# Altium PCB Ultimate_Strat_PCB.PcbDoc (part 2 of 2)
Units mil, origin at the board's own origin, x right, y up, seen from the top; angles counter-clockwise.
Board outline 3685.72 x 1696.1 mil, 2 copper layers (Top Layer, Bottom Layer); 37 components, 56 nets, 274 pads, 347 vias.
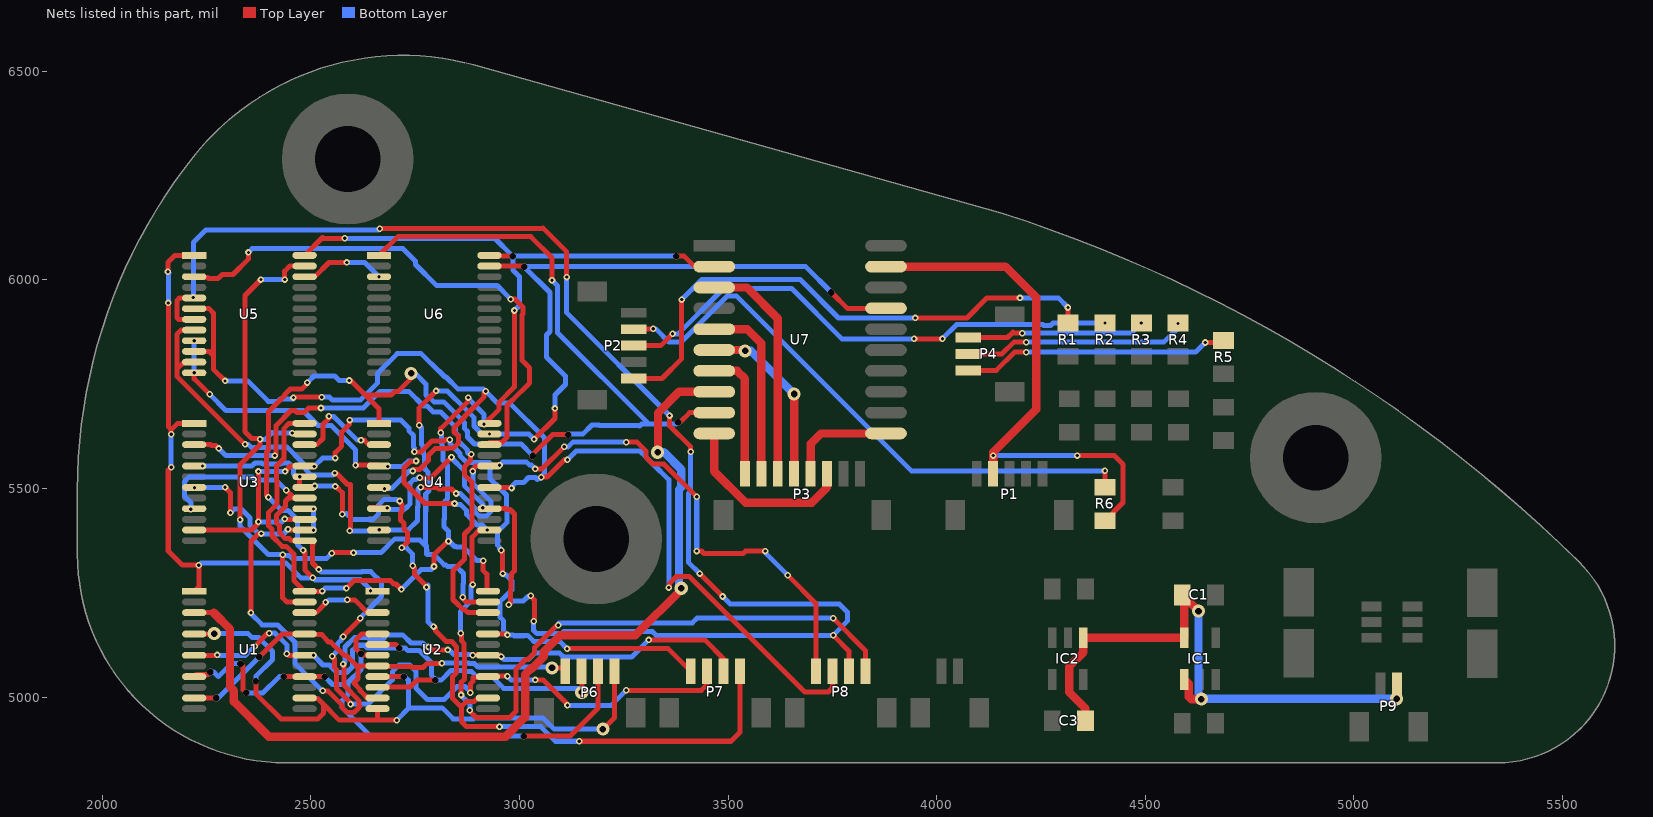
[diagram p2: the nets of this part, all layers, seen from the top]

## Via types
v1: diameter 15.75, hole 7.87, Top Layer to Bottom Layer, 274 vias
v2: diameter 31.5, hole 15.75, Top Layer to Bottom Layer, 47 vias
v3: diameter 15.75, hole 15.75, Top Layer to Bottom Layer, 24 vias
v4: diameter 31.5, hole 7.87, Top Layer to Bottom Layer, 2 vias

## Nets (pads, with @x,y where several pads share a name; then routed paths per layer and width w, separated by ;. In a path a pad name is that pad's centre, name@x,y a point inside that pad or via, vN(x,y) a via of type N, cw(c..) or ccw(c..) an arc to the next point about the centre after c; other vN are vias at no path point) (continued)
NetP1_4: P1.4 R6.2 U7.19 | length 1332.8
  Top Layer w12: v1@4133,5576 4135.63,5578.63 v1(4136,5579) ; v1(4337,5579) 4426,5579 4447,5558 4447,5466.33 R6.2@4403.67,5423
  Top Layer w20: U7.19@3878.81,6032 4165,6032 4239.17,5957.83 4239.17,5690.17 4135.63,5586.63 4135.63,5578.63 P1.4@4135.63,5535.88
  Bottom Layer w12: v1(4136,5579) v1(4337,5579)
NetP2_1: P2.1 R1.1 | length 1327
  Top Layer w12: P2.1@3273.92,5763.89 3341.89,5763.89 3389,5811 v1(3389,5953) ; v1(3949,5909) 4073,5909 4121,5957 v1(4200,5957) ; R1.1@4315,5897 v1(4315,5934)
  Bottom Layer w12: v1(3389,5953) 3437,6001 3673,6001 3765,5909 v1(3949,5909) ; v1(4200,5957) 4292,5957 v1(4315,5934)
NetP2_3: P2.3 R2.1 | length 1253.5
  Top Layer w12: P2.3@3273.92,5842.63 3338.63,5842.63 v1(3367,5871) ; v1(3946,5859) v1(4014,5859)
  Bottom Layer w12: v1(3367,5871) 3381,5871 3489.35,5979.35 3652.65,5979.35 3773,5859 v1(3946,5859) ; v1(4014,5859) 4047.7,5892.7 4254.77,5892.7 4256.64,5890.83 4273.36,5890.83 4279.53,5897 v1(4403.67,5897)
NetP2_4: P2.4 R6.1 | length 1401.9
  Top Layer w12: P2.4@3273.92,5882 3320,5882 v1(3321,5883) ; R6.1@4403.67,5503 v1(4403.67,5542.33)
  Bottom Layer w12: v1(3321,5883) 3326.47,5883 3358.64,5850.83 3387.16,5850.83 3497.38,5961.05 3520.62,5961.05 3939.33,5542.33 v1(4403.67,5542.33)
NetP3_3: P3.3 U7.10 | length 440.8
  Top Layer w20: U7.10@3467,5632 3467,5541 3541.83,5466.17 3701.17,5466.17 3737.32,5502.32 P3.3@3737.32,5535.88
NetP3_4: P3.4 U7.11 | length 262.3
  Top Layer w20: P3.4@3697.95,5535.88 3697.95,5606.95 3723,5632 U7.11@3878.81,5632
NetP3_5: P3.5 U7.6 | length 425.9
  Top Layer w20: U7.6@3467,5832 3539,5832 v2(3541,5830) ; P3.5@3658.58,5535.88 v2(3658.58,5726.58)
  Bottom Layer w20: v2(3541,5830) 3555.15,5830 v2(3658.58,5726.58)
NetP3_6: P3.6 U7.3 | length 554.9
  Top Layer w20: U7.3@3467,5982 3545,5982 3619.21,5907.79 P3.6@3619.21,5535.88
NetP3_7: P3.7 U7.5 | length 439.1
  Top Layer w20: U7.5@3467,5882 3546,5882 3579.84,5848.16 P3.7@3579.84,5535.88
NetP3_8: P3.8 U7.7 | length 308.8
  Top Layer w20: U7.7@3467,5782 3522,5782 3540.47,5763.53 P3.8@3540.47,5535.88
NetP4_1: P4.1 R3.1 | length 432
  Top Layer w12: P4.1@4075.59,5861.92 4170.16,5861.92 4183.24,5875 4185.71,5872.53 v1(4205.35,5872.53)
  Bottom Layer w12: v1(4205.35,5872.53) 4466.53,5872.53 v1(4491,5897)
NetP4_2: P4.2 R4.1 | length 541.3
  Top Layer w12: P4.2@4075.59,5822.55 4156.67,5822.55 4185.12,5851 v1(4215,5851) ; v1(4579,5895.5) R4.1@4579,5897
  Bottom Layer w12: v1(4215,5851) 4545,5851 4579,5885 v1(4579,5895.5)
NetP4_3: P4.3 R5.1 | length 642.2
  Top Layer w12: P4.3@4075.59,5783.18 4143.18,5783.18 4187,5827 v1(4215,5827) ; v1(4644,5850) 4683,5850 R5.1@4688,5855
  Bottom Layer w12: v1(4215,5827) 4621,5827 v1(4644,5850)
NetU1_1: U1.1 U2.1 U3.1 U4.1 U5.1 U6.1 U7.9 | length 4230.1
  Top Layer w12: v1(2157,6020) 2157,6042 2174,6059 U5.1@2220,6059 ; v1(2158,5945) 2158,5648 2165,5641 ; v1(2165,5551) 2157.83,5543.83 2157.83,5350.17 2192,5316 v1(2231,5316) 2231,5264.59 U1.1@2220,5253.59 ; v1(2165,5630) 2165,5641 ; U3.1@2220,5656.3 2180.3,5656.3 2165,5641 ; v1(2398,5479) 2393.3,5483.7 2393.3,5531.77 2394.17,5532.64 2394.17,5549.36 2393.3,5550.23 2393.3,5587.36 2398.17,5592.23 2398.17,5683.7 2437.83,5723.36 2437.83,5726.36 2449.64,5738.17 2477.64,5738.17 2491,5751.53 v1(2491,5754) ; v1(2481,5352) 2485.23,5347.77 2485.23,5304.77 v1(2504,5286) ; v1(2592,5759) 2595.47,5759 2630.77,5723.7 ; U4.1@2663.14,5656.3 2663.14,5691.33 2630.77,5723.7 ; U6.1@2663.14,6059 2708.14,6104 3027,6104 3078,6053 v1(3078,5999) ; v2@2739.25,5775.25 2739.25,5763.37 2708.93,5733.05 2701.38,5733.05 2692.04,5723.7 2630.77,5723.7 ; v3(3032,5578) 3032,5582 3079,5629 v3(3117,5629) ; v3(3380,5659) 3385,5659 3408,5682 U7.9@3467,5682
  Top Layer w20: v2@2739.25,5775.25 v2(2740,5776)
  Bottom Layer w12: v1(2157,6020) 2160.22,6016.78 2158,6014.56 v1(2158,5945) ; v1(2165,5551) v1(2165,5630) ; v1(2231,5316) 2236.13,5321.13 2440.66,5321.13 2475.78,5286 v1(2504,5286) 2505.47,5286 2510.24,5281.23 2618.77,5281.23 2643,5257 v1(2643,5255) ; v1(2398,5479) 2429.83,5447.17 2445.36,5447.17 2467.53,5425 2467.53,5365.47 v1(2481,5352) ; v1(2491,5754) 2493.83,5756.83 2494.36,5756.83 2507.13,5769.6 2556.87,5769.6 2567.47,5759 v1(2592,5759) ; v2(2740,5776) 2750,5776 2775.83,5750.17 2775.83,5723.99 2783.7,5716.12 2786.18,5716.12 2794.61,5707.69 2818.31,5707.69 2868.53,5657.47 2868.53,5643.41 2875.47,5636.46 2875.47,5623.34 2891.99,5606.83 3003.88,5606.83 3032,5578.71 v3(3032,5578) ; v1(3078,5999) 3091.47,5985.53 3091.47,5873.06 3306,5658.53 3306,5658.22 ; v3(3117,5629) 3118.3,5630.3 3151.77,5630.3 3173.82,5652.35 3190.53,5652.35 3192.4,5650.47 3287.57,5650.47 3288.21,5649.84 3292.6,5654.22 3306,5654.22 3306,5658.22 ; v3(3380,5659) 3375.65,5654.65 3309.57,5654.65 3306,5658.22
NetU1_3: U1.3 U7.8 | length 2218
  Top Layer w12: U1.3@2220,5202.41 2220.3,5202.11 2266.89,5202.11
  Top Layer w20: 2266.89,5202.11 2306.05,5162.95 2306.05,5122.37 2305.95,5122.27 2305.95,5024.61 2315.22,5015.34 2315.22,4988.78 2399.17,4904.83 2966.83,4904.83 3013.6,4951.6 3013.6,5028.82 3013.47,5028.94 3013.47,5054.27 3026.85,5067.65 3028.85,5067.65 3058.35,5097.15 3058.35,5109.05 3097.12,5147.83 3277.48,5147.83 3388,5258.35 v2(3388,5261) ; v2(3331,5587) 3332,5588 3332,5681.19 3382.81,5732 U7.8@3467,5732
  Bottom Layer w20: v2(3331,5587) 3346,5587 3388,5545 3388,5503.06 3382.53,5497.59 3382.53,5266.47 v2(3388,5261)
NetU1_22: U1.22 U2.3 | length 201.2
  Top Layer w12: U1.22@2484.86,5202.41 2512.41,5202.41 2535,5225 v1(2535,5227) ; v1(2587,5233) 2604.75,5233 2635.18,5202.57 U2.3@2659.57,5202.57
  Bottom Layer w12: v1(2535,5227) 2537,5227 2543,5233 v1(2587,5233)
NetU1_23: U1.23 U2.23 U3.23 U4.23 U5.23 U6.23 U7.17 | length 4030.5
  Top Layer w12: v1(2330,5425) 2330,5557 2378,5605 v1(2378,5618) 2376.05,5619.95 2358.38,5619.95 2341.95,5636.38 2341.95,5962.95 v1(2380,6001) ; v1(2432.3,5341.3) 2432.3,5237.7 2442,5228 U1.23@2484.86,5228 ; v1(2437,6001) 2437,6021 2449.41,6033.41 U5.23@2484.86,6033.41 ; v1(2455,5633) 2455,5632 2456.3,5630.7 U3.23@2484.86,5630.7 ; v1(2550,5345) 2552.64,5347.64 2552.64,5347 2553.64,5346 v1(2602,5346) ; v1(2759.35,5651.35) 2759.35,5693.35 v1(2800,5734) ; v1(2864,5239) 2862.62,5239 2862.05,5238.42 2872.64,5227.83 2924.1,5227.83 U2.23@2924.43,5228.16 U2.23@2938.16,5228.16 ; U4.23@2927.7,5631 v1(2928,5630.7) ; U6.23@2928,6033.41 3009.59,6033.41 v3(3011,6032) ; v1(3035,5618) 3085,5668 v1(3085,5692) ; v3(3748,5970) 3786,5932 U7.17@3878.81,5932
  Bottom Layer w12: v1(2330,5425) 2330,5409.59 2398.29,5341.3 v1(2432.3,5341.3) 2434.17,5339.43 2448.23,5339.43 2455.83,5331.83 2536.83,5331.83 v1(2550,5345) ; v1(2378,5618) 2391,5618 2407,5634 2408,5633 v1(2455,5633) ; v1(2380,6001) v1(2437,6001) ; v1(2602,5346) 2668,5346 2701.17,5379.17 2725.42,5379.17 2728.06,5376.53 2760.94,5376.53 2775.17,5362.3 2777.23,5362.3 ; v1(2759.35,5651.35) 2764.53,5646.17 2764.53,5606 2768.23,5602.3 2768.23,5590.17 2770.1,5588.3 2770.1,5582.35 2772.23,5580.22 2772.23,5548.17 2781.17,5539.23 2781.17,5528.77 2783.17,5526.77 2783.17,5494.64 2775.23,5486.7 2775.23,5445.83 2774.23,5444.83 2774.23,5365.3 2777.23,5362.3 ; v1(2800,5734) 2827,5734 2839,5722 2859.29,5701.71 2891.24,5669.76 2890.83,5669.36 2890.83,5649.64 2909.77,5630.7 v1(2928,5630.7) 3022.3,5630.7 v1(3035,5618) ; v1(2864,5239) 2864.44,5239.44 2864.44,5271.23 2865.59,5272.38 2865.59,5296.34 2848.4,5313.53 2827,5313.53 2823.36,5317.17 2819.36,5317.17 2794.17,5342.36 2778,5342.36 ; v1(3085,5692) 3085,5724.12 3110.17,5749.3 3110.17,5769.36 3064.67,5814.86 3064.67,5868.14 3073.17,5876.64 3073.17,5969.83 v3(3011,6032) 3686,6032 v3(3748,5970) ; 2777.23,5353.77 2777.23,5362.3 ; 2777.23,5353.77 2777.23,5343.13 2778,5342.36 ; 2777.23,5353.77 2778,5353 2778,5342.36
NetU1_24: U1.24 U2.24 U3.24 U4.24 U5.24 U6.24 U7.2 | length 3112.9
  Top Layer w12: U3.24@2484.86,5656.3 2447.54,5656.3 2434.77,5643.53 2434.77,5571.77 2417.83,5554.83 2417.83,5518.64 2418.17,5518.3 2418.17,5462.58 2398.53,5442.94 2398.53,5410.6 2406.53,5402.6 2406.53,5386.06 2431.06,5361.53 2440.6,5361.53 2459,5343.13 2459,5279.45 U1.24@2484.86,5253.59 2526.59,5253.59 v1(2527,5254) ; U5.24@2484.86,6059 2527.86,6102 2529.86,6100 v1(2581,6100) ; v1(2585,5261) 2603.17,5279.17 2627.64,5279.17 2627.7,5279.23 2690.14,5279.23 2698.3,5271.07 2703.93,5271.07 v1(2717,5258) ; v1(2795,5313) 2795,5341 2827.86,5373.86 v1(2829.75,5373.86) ; v1(2811,5634) 2811,5643.54 2877,5709.54 v1(2877,5718) ; v1(2913,5327) 2913,5303 2921.53,5294.47 2921.53,5256.65 U2.24@2924.43,5253.75 ; v1(2915,5654) 2951.18,5690.18 2951.18,5706.65 2987.78,5743.25 v1(2987.78,5926.78) ; U6.24@2928,6059 2930,6057 v3(2984,6057) ; v3(3376,6057) 3395,6057 3420,6032 U7.2@3467,6032
  Bottom Layer w12: v1(2527,5254) 2534,5261 v1(2585,5261) ; v1(2581,6100) 2937,6100 2939,6102 v3(2984,6057) ; v1(2717,5258) 2717,5258.41 2764.06,5305.47 2789.47,5305.47 2789.47,5307.47 v1(2795,5313) ; v1(2811,5634) 2812.77,5632.23 2812.77,5620.83 2812.83,5620.77 2812.83,5608.64 2814.7,5606.77 2814.7,5600.82 2816.83,5598.69 2816.83,5566.64 2827.77,5555.7 2827.77,5476.17 2819.83,5468.23 2819.83,5427.36 2818.83,5426.36 2818.83,5408.64 2829.75,5397.72 v1(2829.75,5373.86) 2829.75,5372.5 2830,5372.25 2830.87,5373.13 2832.22,5373.13 2844.22,5361.13 2847.35,5361.13 2848.47,5360 2865,5360 2898,5327 v1(2913,5327) ; v1(2877,5718) 2877,5716 2915,5678 v1(2915,5654) ; v1(2987.78,5926.78) 3000,5939 3000,6008 2984,6024 v3(2984,6057) ; v3(3376,6057) v3(2984,6057)
NetU2_22: U2.22 U3.3 | length 1351.6
  Top Layer w12: U3.3@2220,5605.11 2259.22,5605.11 2261.38,5602.95 2272.05,5602.95 v1(2279,5596) ; v1(2413.47,5579) 2416.47,5582 2416.47,5651.11 2452.19,5686.83 2461.64,5686.83 2466.64,5681.83 2483.36,5681.83 2494.53,5693 v1(2524,5693) ; v1(2884,5582) 2882,5584 2882,5566.88 2875.47,5560.35 2875.47,5559.06 2868.22,5551.81 2868.22,5550.53 2867.7,5550.01 2867.7,5533.3 2886.47,5514.53 2886.47,5409.13 2868.22,5390.88 2868.22,5330.43 2840,5302.21 2840,5233 2842.75,5230.25 2844.22,5230.25 2864.94,5209.53 2869.01,5209.53 2875.97,5202.57 U2.22@2924.43,5202.57 U2.22@2926.17,5200.83
  Bottom Layer w12: v1(2279,5596) 2296,5579 2357.59,5579 2358.06,5579.47 2413,5579.47 v1(2413.47,5579) ; v1(2524,5693) 2524.4,5693.4 2626,5693.4 2665.65,5733.05 2734.67,5733.05 2769.9,5697.82 2778.6,5697.82 2792.9,5683.51 2810.95,5683.51 2846.23,5648.24 2846.23,5634.17 2853.17,5627.23 2853.17,5614.1 2874.47,5592.81 2874.47,5591.94 2875.47,5590.94 2875.47,5586.34 2877.82,5584 2882,5584 v1(2884,5582)
NetU3_22: U3.22 U4.3 | length 259.9
  Top Layer w12: U3.22@2484.86,5605.11 2514.11,5605.11 2528.93,5619.93 2528.93,5653.72 2544,5668.79 2544,5672 v1(2543,5673) ; v1(2620,5616) 2627.86,5616 2640.86,5603 2661.02,5603 U4.3@2663.14,5605.11
  Bottom Layer w12: v1(2543,5673) 2554,5673 2611,5616 v1(2620,5616)
NetU4_22: U4.22 U5.3 | length 1287.1
  Top Layer w12: U5.3@2220,6007.82 2221.87,6005.95 2252.38,6005.95 2254.38,6003.95 2277.62,6003.95 2279.62,6005.95 2280.29,6005.95 2287.38,6013.05 2313.05,6013.05 2350,6050 v1(2350,6066) ; U4.22@2928,5605.11 2928,5610.18 2957.45,5610.18 2969.48,5622.2 2969.48,5699.07 2982.94,5712.53 2983.94,5712.53 3024.4,5752.99 3024.4,5789.01 3006.08,5807.33 3006.08,5916.55 3007.95,5918.42 3007.95,5935.13 2989.08,5954 v1(2979,5954)
  Bottom Layer w12: v1(2350,6066) 2358.87,6074.87 2720.79,6074.87 2750.64,6045.03 2750.64,6036.9 2800.54,5987 2946,5987 v1(2979,5954)
NetU5_22: U5.22 U6.3 | length 206.6
  Top Layer w12: U5.22@2484.86,6007.82 2509.25,6007.82 2543.43,6042 v1(2586,6042)
  Bottom Layer w12: v1(2586,6042) 2628.96,6042 v1(2663.14,6007.82)
North_Finish_Bridge: P8.2 U4.9 U4.16 U5.5 U5.7 | length 4280.7
  Top Layer w12: v1(2218,5958) U5.5@2219.36,5956.64 ; U5.7@2220,5905.46 2182.54,5905.46 2178.52,5909.48 2178.52,5950.52 2184.64,5956.64 U5.5@2219.36,5956.64 ; U5.5@2220,5956.64 U5.5@2219.36,5956.64 ; U4.9@2642,5454 2660.71,5454 U4.9@2663.14,5451.57 2665.57,5454 2666.57,5453 v1(2683,5453) ; v1(2665,6123) 3054.1,6123 3056.05,6124.95 3113,6068 v1(3113,6007) ; v1(2761,5525.6) 2787.6,5525.6 v1(2837,5575) ; U4.16@2908,5449 2911,5452 2909,5454 v1(2912,5454) ; U4.16@2928,5451.57 2965.9,5451.57 2967.64,5449.83 2977.17,5449.83 2987.92,5439.08 2987.92,5302.78 2980.65,5295.51 2980.65,5286.19 2980.17,5285.71 2980.17,5257.55 2978.87,5256.25 2978.87,5225.87 v1(2974,5221) ; v1(3027,5243) 3027,5241.43 3035.62,5232.8 3035.62,5183.62 v1(3034,5182) ; v1(3359.83,5674.83) 3359.83,5650.64 3410.3,5600.17 v1(3410.3,5588.3) ; v1(3432,5296) v1(3487,5241) ; v1(3752,5148) 3789.89,5110.11 P8.2@3789.89,5061.88
  Bottom Layer w12: v1(2218,5958) 2218,6090 2248.22,6120.22 2662.22,6120.22 v1(2665,6123) ; v1(2683,5453) 2683,5450 2683.17,5449.83 2723.3,5449.83 2726.64,5453.17 2727.7,5453.17 2737.87,5463.34 2737.87,5489.6 2737.83,5489.64 2737.83,5512.83 2746.83,5521.83 2752.36,5521.83 2757.53,5527 2758.93,5525.6 v1(2761,5525.6) ; v1@2837.87,5574.13 v1(2837,5575) 2837,5573.06 2866.17,5543.89 2867.7,5543.89 2867.7,5506.92 2912,5462.62 v1(2912,5454) ; v1(2974,5221) 2983.08,5230.08 3009.29,5230.08 3020.41,5241.2 3023.47,5241.2 3025.27,5243 v1(3027,5243) ; v1(3034,5182) 3034,5159.54 3041.72,5151.83 3101.36,5151.83 3106.7,5157.17 3318.36,5157.17 3327.53,5148 v1(3752,5148) 3786,5182 3786,5204 3767,5223 3505,5223 v1(3487,5241) ; v1(3113,6007) 3113,5921.65 v1(3359.83,5674.83) ; v1(3410.3,5588.3) 3410.3,5493.83 3404.83,5488.36 3404.83,5323.17 v1(3432,5296)
North_Finish_Middle: P7.2 U2.18 U3.7 U3.14 U3.16 | length 2228.6
  Top Layer w12: U3.7@2220,5502.75 v1(2220.75,5502) ; v1(2294,5503) 2307,5490 v1(2307,5442.12) ; v1(2356,5202) 2356,5373 2375,5392 v1(2381,5392) ; v1(2445,5402) 2446.61,5400.39 U3.14@2484.86,5400.39 2485.25,5400 v1(2506,5400) ; v1(2528.34,5015) 2540.38,5015 2574.83,4980.56 2574.83,4974.64 2586.64,4962.83 2603.36,4962.83 2615.17,4974.64 2615.17,4975.89 2617,4977.72 2615.17,4979.54 2615.17,4991.36 2613.3,4993.23 2613.3,4993.84 2579.21,5027.93 2579.21,5076.79 v1(2577,5079) ; v1(2782,5120) 2789,5113 v1(2828,5113) ; v1(2887.8,5100.2) U2.18@2924.43,5100.2 2952.8,5100.2 v1(2956,5097) ; v1(3310,5137) 3444,5137 3489.29,5091.71 P7.2@3489.29,5061.88
  Bottom Layer w12: v1(2220.75,5502) 2293,5502 v1(2294,5503) ; v1(2307,5442.12) 2315.88,5451 2332.53,5451 2353.83,5429.7 2353.83,5411.64 2373.47,5392 v1(2381,5392) 2382,5391 2434,5391 v1(2445,5402) ; v1(2356,5202) 2356,5200.35 2383.17,5173.17 2419.71,5173.17 2462.17,5130.71 2462.17,5079.89 2527.07,5015 v1(2528.34,5015) ; v1(2506,5400) 2506,5447.78 2507.61,5449.39 v1(2506,5451) ; v1(2577,5079) 2581.53,5083.53 2581.53,5119.94 2604.06,5142.47 2635.94,5142.47 2641.98,5136.43 2670.15,5136.43 2683.05,5149.33 2719.95,5149.33 2739.75,5129.53 2767.75,5129.53 2777.28,5120 v1(2782,5120) ; v1(2828,5113) 2831.65,5113 2842.57,5102.08 2885.92,5102.08 v1(2887.8,5100.2) ; v1(2956,5097) 2963.05,5089.95 3020.95,5089.95 3037,5106 3095.47,5106 3105.64,5095.83 3268.83,5095.83 v1(3310,5137)
North_Finish_Neck: P6.2 U1.9 U1.16 U2.5 U2.7 | length 1521.9
  Top Layer w12: U1.9@2220,5048.87 2225.06,5053.93 2252.93,5053.93 v3(2259,5060) ; v3(2331,5080) 2337.52,5073.48 2337.52,5017.48 v3(2345,5010) ; v3(2435,5049) 2435.13,5048.87 U1.16@2484.86,5048.87 v3(2532.87,5048.87) ; U2.7@2659.57,5101.27 2622.38,5101.27 2608,5115.64 2608,5137 2622.39,5151.39 U2.5@2659.57,5151.39 ; v3(3010,4906) 3121,4906 3188.68,4973.69 P6.2@3188.68,5061.88
  Bottom Layer w12: v3(2259,5060) 2266.73,5060 2277.87,5048.87 2309,5080 v3(2331,5080) ; v3(2345,5010) 2385,5010 2424,5049 v3(2435,5049) ; v3(2532.87,5048.87) 2551.78,5029.95 2584.27,5029.95 2589,5034.68 ; v3(2620,5104) 2620,5065.68 2589,5034.68 ; v3(3010,4906) 2643.47,4906 2574.83,4974.64 2574.83,4991.36 2589,5005.53 2589,5034.68
North_Start_Bridge: P8.1 U4.5 U4.14 U5.9 U5.12 | length 2756.7
  Top Layer w12: v1(2220,5777.5) 2220,5763 v1(2257,5726) ; v1(2220,5854.28) 2239.72,5854.28 U5.9@2241,5853 ; v1(2607,5556) 2661.07,5556 U4.5@2663.14,5553.93 ; v1(2752.06,5565.95) 2750.98,5564.87 2738.34,5564.87 2722.92,5549.44 2722.92,5514.56 2773.42,5464.05 v1(2844.18,5464.05) ; v1(2859,5153) 2860.83,5151.17 2860.83,5134.64 2867.47,5128 2867.47,5108.71 2867.62,5108.56 2867.62,5042.48 2859.95,5034.81 v1(2859.95,5004.96) ; v1(2881,4968) 2881,4965.7 2895.7,4951 2977,4951 2991.3,4965.3 2991.3,5019.58 2991.17,5019.71 2991.17,5066.9 3014.23,5089.95 3019.62,5089.95 3036.05,5106.38 3036.05,5118.29 3089.76,5172 v1(3093,5172) ; v1(2887.71,5269.65) 2886.52,5270.84 2886.52,5383.3 2903.61,5400.39 v1(2922.61,5400.39) ; v1(3752,5189) 3829.26,5111.74 P8.1@3829.26,5061.88
  Bottom Layer w12: v1(2220,5777.5) v1(2220,5854.28) ; v1(2257,5726) 2296,5687 2481,5687 2517,5651 2548.7,5651 2607,5592.7 v1(2607,5556) ; v1(2684,5553) 2720.65,5553 2727.95,5560.3 2728.57,5560.3 2734.22,5565.95 v1(2752.06,5565.95) ; v1(2844.18,5464.05) 2846.05,5462.17 2858.23,5462.17 2873.53,5446.88 2873.53,5438.06 2878.47,5433.12 2878.47,5432.12 2898.06,5412.53 2910.47,5412.53 v1(2922.61,5400.39) ; v1(2859,5153) 2859,5205.47 2884.17,5230.64 2884.17,5266.12 v1(2887.71,5269.65) ; v1(2859.95,5004.96) 2859.95,5005.42 2859,5004.47 2875.21,4988.26 2877.74,4988.26 2881,4985 v1(2881,4968) ; v1(3093,5172) 3093,5176 3094.92,5177.92 3414.39,5177.92 3425.47,5189 v1(3752,5189)
North_Start_Middle: P7.1 U2.14 U3.5 U3.18 U3.19 | length 2216.9
  Top Layer w12: U3.5@2220,5553.93 v1(2240.07,5553.93) ; U3.19@2484.86,5528.34 2484.52,5528 v1(2473,5528) 2473,5502.75 U3.18@2484.86,5502.75 2507.75,5502.75 2510,5505 v1(2509,5506) ; v1(2558,5505) 2560,5505 2575.17,5489.83 2575.17,5438.17 v1(2575,5438) ; v1(2713,5470) 2713,5466.53 2718.17,5461.36 2718.17,5444.7 2714.83,5441.36 2714.83,5424.56 2722.92,5416.47 2722.92,5402.91 2731,5394.83 2731,5371 v1(2718,5358) ; v1(2744,5315) 2743.28,5315 2748.53,5309.75 2748.53,5293.75 2777,5265.28 v1(2777,5263) ; v1(2794,5169) 2794.66,5169 2795,5169.34 2798.84,5165.5 2798.84,5158.5 2824.16,5133.17 2837.36,5133.17 2842.53,5128 2842.53,5127.06 2849.17,5120.42 2849.17,5058.51 2839.78,5049.11 2839.78,4996.6 2858.03,4978.36 2860.83,4978.36 ; U2.14@2924.43,4997.84 2900.04,4997.84 2891,4988.8 2872.32,4988.8 2861.88,4978.36 2860.83,4978.36 ; v1(2952,4929) 2873,4929 2860.83,4941.17 2860.83,4978.36 ; v1(3143,4894) 3507,4894 3528.66,4915.66 P7.1@3528.66,5061.88
  Bottom Layer w12: v1(2240.07,5553.93) 2358.4,5553.93 2365.64,5561.17 2382.36,5561.17 2384.7,5558.83 2427.3,5558.83 2429.64,5561.17 2446.36,5561.17 2458.17,5549.36 2458.17,5535.36 2465.53,5528 v1(2473,5528) ; v1(2509,5506) 2557,5506 v1(2558,5505) ; v1(2575,5438) 2577.23,5440.23 2584.83,5440.23 2599.06,5426 2649,5426 2662.3,5439.3 2662.3,5460.83 2675.64,5474.17 2705.36,5474.17 2707.79,5471.74 2712.26,5471.74 2713,5471 v1(2713,5470) ; v1(2718,5358) 2728.67,5358 2744,5342.67 v1(2744,5315) ; v1(2777,5263) 2777,5264.88 2779,5266.88 2778.88,5267 2780.58,5268.7 2780.58,5180.42 2792,5169 v1(2794,5169) ; v1(2952,4929) 3051.12,4929 3086.12,4894 v1(3143,4894)
North_Start_Neck: P6.1 U1.5 U1.14 U2.9 U2.12 | length 1633.6
  Top Layer w12: U1.5@2220,5150.93 v2@2266.93,5150.93 ; v3(2368,5038) 2368,5008 2428.43,4947.57 2515.97,4947.57 2530.34,4961.94 2530.34,4982.25 ; U1.14@2485.93,4996.62 2515.97,4996.62 2530.34,4982.25 ; U2.12@2659.57,4972.25 2659.57,4948.1 2656,4944.53 ; U2.9@2659.57,5049.02 2660.55,5050 2661.55,5049 v3(2723,5049) ; v1(2705.53,4944.53) 2656,4944.53 ; v2(3200,4923) 3228.06,4951.06 P6.1@3228.06,5061.88 ; 2530.34,4982.25 2568.07,4944.53 2656,4944.53
  Top Layer w20: v2@2266.93,5150.93 v2(2268,5152)
  Bottom Layer w12: v2(2268,5152) 2349.49,5152 2359.32,5142.17 2375.15,5142.17 2408.05,5109.27 2408.05,5090.05 2368,5050 v3(2368,5038) ; v1(2705.53,4944.53) 2733.75,4972.75 ; v3(2723,5049) 2725,5049 2733.75,5040.25 2733.75,4972.75 ; v2(3200,4923) 3083,4923 3056.83,4949.17 2890.7,4949.17 2889.36,4947.83 2840.83,4947.83 2814.65,4974 2735,4974 2733.75,4972.75
South_Finish_Bridge: P8.4 U4.11 U4.20 U5.8 U5.11 | length 2714.6
  Top Layer w12: U5.11@2220,5803.09 2195.61,5803.09 2178.52,5786.01 ; U5.8@2220,5879.87 2188.87,5879.87 2178.52,5869.52 2178.52,5786.01 ; v1(2342,5606) 2341.52,5606 2178.52,5769 2178.52,5786.01 ; v1(2557,5537) 2560.28,5537 2587.75,5509.53 2594.47,5509.53 2595.17,5508.83 2595.17,5401.17 v1(2593,5399) 2595,5399 v1@2595.36,5398.64 ; U4.11@2663.14,5400.39 v1(2663.75,5401) ; v1(2763,5503) 2801,5503 2802,5504 2807,5499 2837,5499 v1(2848,5488) ; v1(2887.88,5541.65) 2886.52,5543.01 2886.52,5544.23 2893.77,5551.48 2893.77,5552.77 2894.93,5553.93 U4.20@2928,5553.93 2930.07,5556 v1(2952,5556) U4.20@2954,5556 ; v1(3038,5547) 3038.17,5547.17 3054.17,5547.17 v1(3107,5600) ; v1(3256,5611) 3282.34,5611 3302.95,5590.38 3302.95,5575.38 3319.38,5558.95 3346.05,5558.95 v1(3425,5480) ; v1(3425,5350) 3436.24,5350 3442.1,5344.14 3536.48,5344.14 3542.33,5350 v1(3589,5350) ; v1(3643,5292) 3711.15,5223.85 P8.4@3711.15,5061.88
  Bottom Layer w12: v1(2342,5606) 2349.65,5606 2357.83,5597.83 2396.83,5597.83 2398.17,5599.17 2442.83,5599.17 2487.83,5554.17 2487.83,5544.64 2499.64,5532.83 2552.83,5532.83 v1(2557,5537) ; v1(2593,5399) 2593.3,5398.7 2661.45,5398.7 v1(2663.75,5401) 2733.53,5401 2755.93,5423.4 2755.93,5455.52 2756.17,5455.77 2756.17,5497.18 ; v1(2763,5503) 2763,5504 2762,5505 2756.13,5499.13 2756.13,5497.22 ; v1(2848,5488) 2858.29,5488 2891.83,5454.46 2891.83,5445.64 2903.64,5433.83 2920.36,5433.83 2932.17,5445.64 2932.17,5468.33 2888.83,5511.68 2888.83,5535.36 2889.35,5535.88 2889.35,5541.65 v1(2887.88,5541.65) ; v1(2952,5556) 2959.17,5563.17 3017.36,5563.17 3024.53,5556 3029,5556 v1(3038,5547) ; v1(3107,5600) 3116.53,5600 3128.53,5612 3255,5612 v1(3256,5611) ; v1(3425,5350) v1(3425,5480) ; v1(3589,5350) 3589,5346 v1(3643,5292) ; 2756.13,5497.22 2756.17,5497.18
South_Finish_Middle: P7.4 U2.20 U3.11 U3.15 U3.20 | length 2146
  Top Layer w12: U3.11@2220,5400.39 2357.51,5400.39 2374,5416.88 v1(2374,5420) v1(2374,5541) ; v1(2437,5427) 2435.98,5425.98 U3.15@2484.86,5425.98 ; v1(2438,5541) 2450.93,5553.93 U3.20@2484.86,5553.93 2484.93,5554 2485.93,5553 v1(2508,5553) 2509,5554 U3.20@2510,5553 ; v1(2558,5573) 2558,5585.93 2573.53,5601.46 2573.53,5635.25 2593,5654.72 v1(2593,5664) ; v1(2748.06,5588) 2764.12,5588 2789.95,5613.83 2819.36,5613.83 2822.53,5617 v1(2833,5617) ; U2.20@2924.43,5151.39 2968.61,5151.39 v1(2971,5149) ; v1(2956,5352) 2959.53,5348.47 2959.53,5296.47 v1(2960,5296) ; v1(3114,5116) 3356.43,5116 P7.4@3410.55,5061.88
  Bottom Layer w12: v1(2374,5420) 2430,5420 v1(2437,5427) ; v1(2374,5541) 2374.47,5540.53 2437.53,5540.53 v1(2438,5541) ; v1(2508,5553) 2528,5573 v1(2558,5573) ; v1(2593,5664) 2716,5664 2734.83,5645.17 2734.83,5638.64 2746.23,5627.24 2746.23,5598.42 2748.06,5596.59 v1(2748.06,5588) ; v1(2833,5617) 2833,5608.4 2856.17,5585.23 2856.17,5584.36 2857.17,5583.36 2857.17,5578.77 2872.24,5563.7 2873.77,5563.7 2875.64,5561.83 2892.36,5561.83 2928.17,5561.83 2931.83,5558.17 2931.83,5549.36 2929.83,5547.36 2929.83,5522.64 2941.64,5510.83 2942.64,5510.83 2968.83,5484.64 2968.83,5452.64 2969.62,5451.85 2969.62,5418.09 2957.36,5405.83 2956.58,5405.83 2946.83,5396.08 2946.83,5364.64 2952.47,5359 2952.47,5355.53 v1(2956,5352) ; v1(2960,5296) 2963.83,5292.17 2968.36,5292.17 2982,5278.53 2982,5257 2966.17,5241.17 2965.64,5241.17 2953.83,5229.36 2953.83,5190.97 2962,5182.79 2962,5158 v1(2971,5149) 2984.34,5149 2986.38,5146.95 3009.62,5146.95 3010.71,5148.05 3019.62,5148.05 3034.14,5133.53 3096.47,5133.53 v1(3114,5116)
South_Finish_Neck: P6.4 U1.11 U1.20 U2.8 U2.11 | length 1114.5
  Top Layer w12: U1.11@2220.06,4997.75 v3(2272.75,4997.75) ; v3(2376,5096) 2431,5151 2439,5151 2439.23,5151.23 U1.20@2484.86,5151.23 2486.09,5150 2526,5150 2541.95,5131.73 2547.8,5131.73 2580.36,5099.17 2585.36,5099.17 2608.61,5075.91 2608.61,5074.61 ; U2.11@2651.38,4997.84 2633.47,4997.84 2633.47,4998.94 2631.6,5000.81 2631.6,5002.91 2630.12,5002.91 2618.09,5014.93 2618.09,5017.79 2603.05,5032.83 2603.05,5034.17 2613.3,5044.42 2613.3,5069.93 2608.61,5074.61 ; U2.8@2659.57,5074.61 2608.61,5074.61 ; U2.8@2664.04,5073.55 2739.92,5073.55 2742.64,5070.83 2768.83,5070.83 2778.93,5080.93 v1(2814.07,5080.93) ; v2(3078,5070) 3099.83,5070 3100.83,5071 P6.4@3109.94,5061.88
  Bottom Layer w12: v3(2272.75,4997.75) 2277.75,4997.75 v3(2376,5096) ; v1(2814.07,5080.93) 2814.07,5082.07 2877.4,5082.07 2879.44,5080.03 2892.13,5080.03 2900.51,5071.65 3070.74,5071.65 v2@3071.09,5072
  Bottom Layer w20: v2@3071.09,5072 3073.54,5074.46 v2(3078,5070)
South_Start_Bridge: P8.3 U4.7 U4.18 U5.6 U5.10 | length 3044.6
  Top Layer w12: U5.10@2220,5828.68 2256.31,5828.68 2266,5819 ; U5.6@2220,5931.05 2255.95,5931.05 2266,5921 2266,5819 ; v1(2294,5758) 2266,5786 2266,5819 ; v1@2460,5718 v1(2458,5718) 2459,5719 v1(2526,5719) ; U4.7@2663.14,5502.75 2666.33,5499.56 v1(2676.38,5499.56) ; v1(2744,5542) 2747.78,5545.78 2760.41,5545.78 2782.26,5567.63 2782.26,5580.26 2797.53,5595.53 2826.94,5595.53 2828.23,5596.83 2841.36,5596.83 2853.17,5608.64 2853.17,5625.36 2843.17,5635.36 2843.17,5645.77 2868.22,5670.81 2868.22,5672.81 2914.58,5719.17 2914.58,5728.58 v1(2919,5733) ; U4.18@2928,5502.75 2979.25,5502.75 v1(2981,5501) ; v1(3052,5527) 3066.02,5527 3108.02,5569 v1(3115,5569) ; v1(3358,5262.54) 3359.95,5264.49 3359.95,5272.62 3376.38,5289.05 3406.95,5289.05 3684,5012 3740,5012 3750.52,5022.52 P8.3@3750.52,5061.88
  Bottom Layer w12: v1(2294,5758) 2348.34,5758 2397.38,5708.95 2420.62,5708.95 2426.66,5715 2458,5715 v1(2458,5718) ; v1(2526,5719) 2544.4,5719 2551.7,5711.7 2618.42,5711.7 2659.3,5752.58 2659.3,5775.83 2706.64,5823.17 2764.41,5823.17 2789.29,5798.29 2790.11,5798.29 2821.17,5767.23 2823.82,5767.23 2852.82,5738.23 2913.77,5738.23 v1(2919,5733) 2947.47,5704.53 2977,5704.53 3060.05,5621.48 3060.05,5536.05 3052,5528 v1(3052,5527) 3049.17,5524.17 3045.36,5524.17 3042.86,5521.67 3038.36,5526.17 3021.64,5526.17 3009.91,5514.44 2991,5514.44 2981,5504.44 v1(2981,5501) ; v1(2676.38,5499.56) 2693.09,5499.56 2735.53,5542 v1(2744,5542) ; v1(3115,5569) 3136,5590 3289,5590 3302.95,5576.05 3302.95,5575.38 3319.38,5558.95 3320.05,5558.95 3358,5521 v1(3358,5262.54)
South_Start_Middle: P7.3 U2.16 U3.9 U3.13 U3.17 | length 2292.1
  Top Layer w12: v1(2212,5450) 2218.43,5450 U3.9@2220,5451.57 ; v1(2441,5496) U3.17@2459.84,5477.16 ; U3.13@2484.86,5374.8 2453.21,5374.8 2448.18,5379.83 2438.64,5379.83 2424.83,5393.64 2424.83,5410.18 2416.83,5418.18 2416.83,5435.36 2439,5457.53 2439,5470 2446.16,5477.16 U3.17@2459.84,5477.16 ; U3.17@2484.86,5477.16 U3.17@2459.84,5477.16 ; U3.13@2492.15,5372.57 2505.4,5372.57 2505.4,5366.12 2503.53,5364.25 2503.53,5321.47 v1(2519,5306) ; v1(2551,5098) 2556.83,5092.17 2556.83,5070.64 2560.91,5066.56 2560.91,5020.35 2595,4986.26 v1(2595,4983) ; v1(2577.18,5144.78) 2579.06,5146.65 2579.06,5148.06 2618.26,5187.26 v1(2618.26,5188.94) ; v1(2882,5010) 2882,5013.98 2882.95,5014.93 2882.95,5031.94 2888.65,5037.63 2888.65,5047 2922.41,5047 U2.16@2924.43,5049.02 2925.41,5050 v1(2971,5050) ; v1(3038,5041) 3056.68,5041 3115,4982.69 v1(3115,4980) ; v1(3256,5016) 3436,5016 3449.92,5029.92 P7.3@3449.92,5061.88
  Bottom Layer w12: v1(2212,5450) 2212,5466.57 2197,5481.57 2197,5517 2207,5527 2359.47,5527 2365.64,5520.83 2416.17,5520.83 2417.83,5519.17 2417.83,5518.64 2440.47,5496 v1(2441,5496) ; v1(2519,5306) 2525.47,5299.53 2621.25,5299.53 2622.25,5300.53 2643.47,5300.53 2669,5275 2669,5241 2616.94,5188.94 v1(2618.26,5188.94) ; v1(2551,5098) 2563.23,5110.23 2563.23,5127.52 2573.3,5137.59 2573.3,5142.77 2577.18,5146.65 v1(2577.18,5144.78) ; v1(2595,4983) 2636.83,4983 2694.95,5041.12 2694.95,5060.62 2711.38,5077.05 2736.42,5077.05 2742.64,5070.83 2742.84,5070.83 2752.05,5061.62 2752.05,5038.38 2752.05,5021.27 2779.2,4994.12 2819.54,4994.12 2850.56,5025.13 2869.4,5025.13 2882,5012.53 v1(2882,5010) ; v1(2971,5050) 2980,5041 v1(3038,5041) ; v1(3115,4980) 3220,4980 v1(3256,5016)
South_Start_Neck: P6.3 U1.7 U1.18 U2.6 U2.10 | length 1366.6
  Top Layer w12: U1.7@2220,5100.05 2274.95,5100.05 2275,5100.09 v1(2275,5101) ; v1(2365,5122) 2396,5153 v1(2400,5153) ; v1(2442,5104) 2445.95,5100.05 U1.18@2484.86,5100.05 ; U1.18@2505,5100 v1(2506,5100) ; U2.6@2659.57,5125.8 2703.2,5125.8 v3(2712,5117) ; U2.10@2664.41,5024 2737.66,5024 2754.13,5040.47 v3(2798.39,5040.47) ; v2(3149.32,5011.31) P6.3@3149.32,5061.88
  Bottom Layer w12: v1(2275,5101) 2275,5100.35 2275.17,5100.17 2339.36,5100.17 2339.53,5100 2343,5100 v1(2365,5122) ; v1(2400,5153) 2414,5153 2442,5125 v1(2442,5104) ; v1(2506,5100) 2529.09,5076.91 2544.48,5076.91 2562.57,5058.83 2585.36,5058.83 2599.83,5073.3 2599.83,5112.36 2611.64,5124.17 2628.36,5124.17 2635.53,5117 v3(2712,5117) 2726.4,5117 2732.17,5111.23 2760.17,5111.23 2788.65,5082.75 2788.65,5052.35 2798.39,5042.61 v3(2798.39,5040.47) 2812.18,5040.47 2835.48,5063.77 2869.82,5063.77 2871.86,5061.73 2884.55,5061.73 2897.81,5048.47 2934.53,5048.47 2962.17,5020.83 3139.8,5020.83 v2(3149.32,5011.31)
VCC: C1.1 C3.1 IC1.1 IC1.5 IC2.1 P9.1 | length 1388
  Top Layer w20: C3.1@4357,4943 4357,4973 4318,5012 4318,5073 4352,5107 IC2.1@4352,5142.2 IC1.5@4594,5142.2 C1.1@4594,5240 ; C1.1@4589,5245 C1.1@4594,5240 ; IC1.1@4594,5042.2 4604.7,5031.5 4604.7,5000.9 4610.6,4995 v2(4635,4995) ; v2(4628,5206) C1.1@4594,5240 ; v2(5103,4996) P9.1@5105,4998
  Bottom Layer w20: v2(4628,5206) 4628,5002 v2(4635,4995) 4636,4996 v2(5103,4996)
pads on no net: P1.6 P1.7 P2.6 P2.7 P3.9 P3.10 P4.4 P4.5 P5.3 P5.4 P6.5 P6.6 P7.5 P7.6 P8.5 P8.6 P9.3 P9.4 U6.22

## Polygon pours and split planes (outlines as drawn)
GND on Top Layer "Top Layer-No Net" (solid, pour order 8): 1940,5342.34 1940,5496.22 cw(c3227.31,5496.22) 2218.14,6295.43 cw(c2720.84,5897.32) 2894.34,6514.66 4156.63,6159.89 cw(c3096.49,2841.75) 5540.09,5324.24 cw(c5345.68,5122.51) 5345.68,4842.34 2440,4842.34 cw(c2440,5342.34)
GND on Bottom Layer "Top Layer-No Net1" (solid, pour order 9): 1940,5342.34 1940,5496.22 cw(c3227.31,5496.22) 2218.14,6295.43 cw(c2720.84,5897.32) 2894.34,6514.66 4156.63,6159.89 cw(c3096.49,2841.75) 5540.09,5324.24 cw(c5345.68,5122.51) 5345.68,4842.34 2440,4842.34 cw(c2440,5342.34)

## Keep-outs
Keep-Out Layer:
  the board outline again, w47.24